# EAGLE board people_counter_v1 (EAGLE 9.6.2)
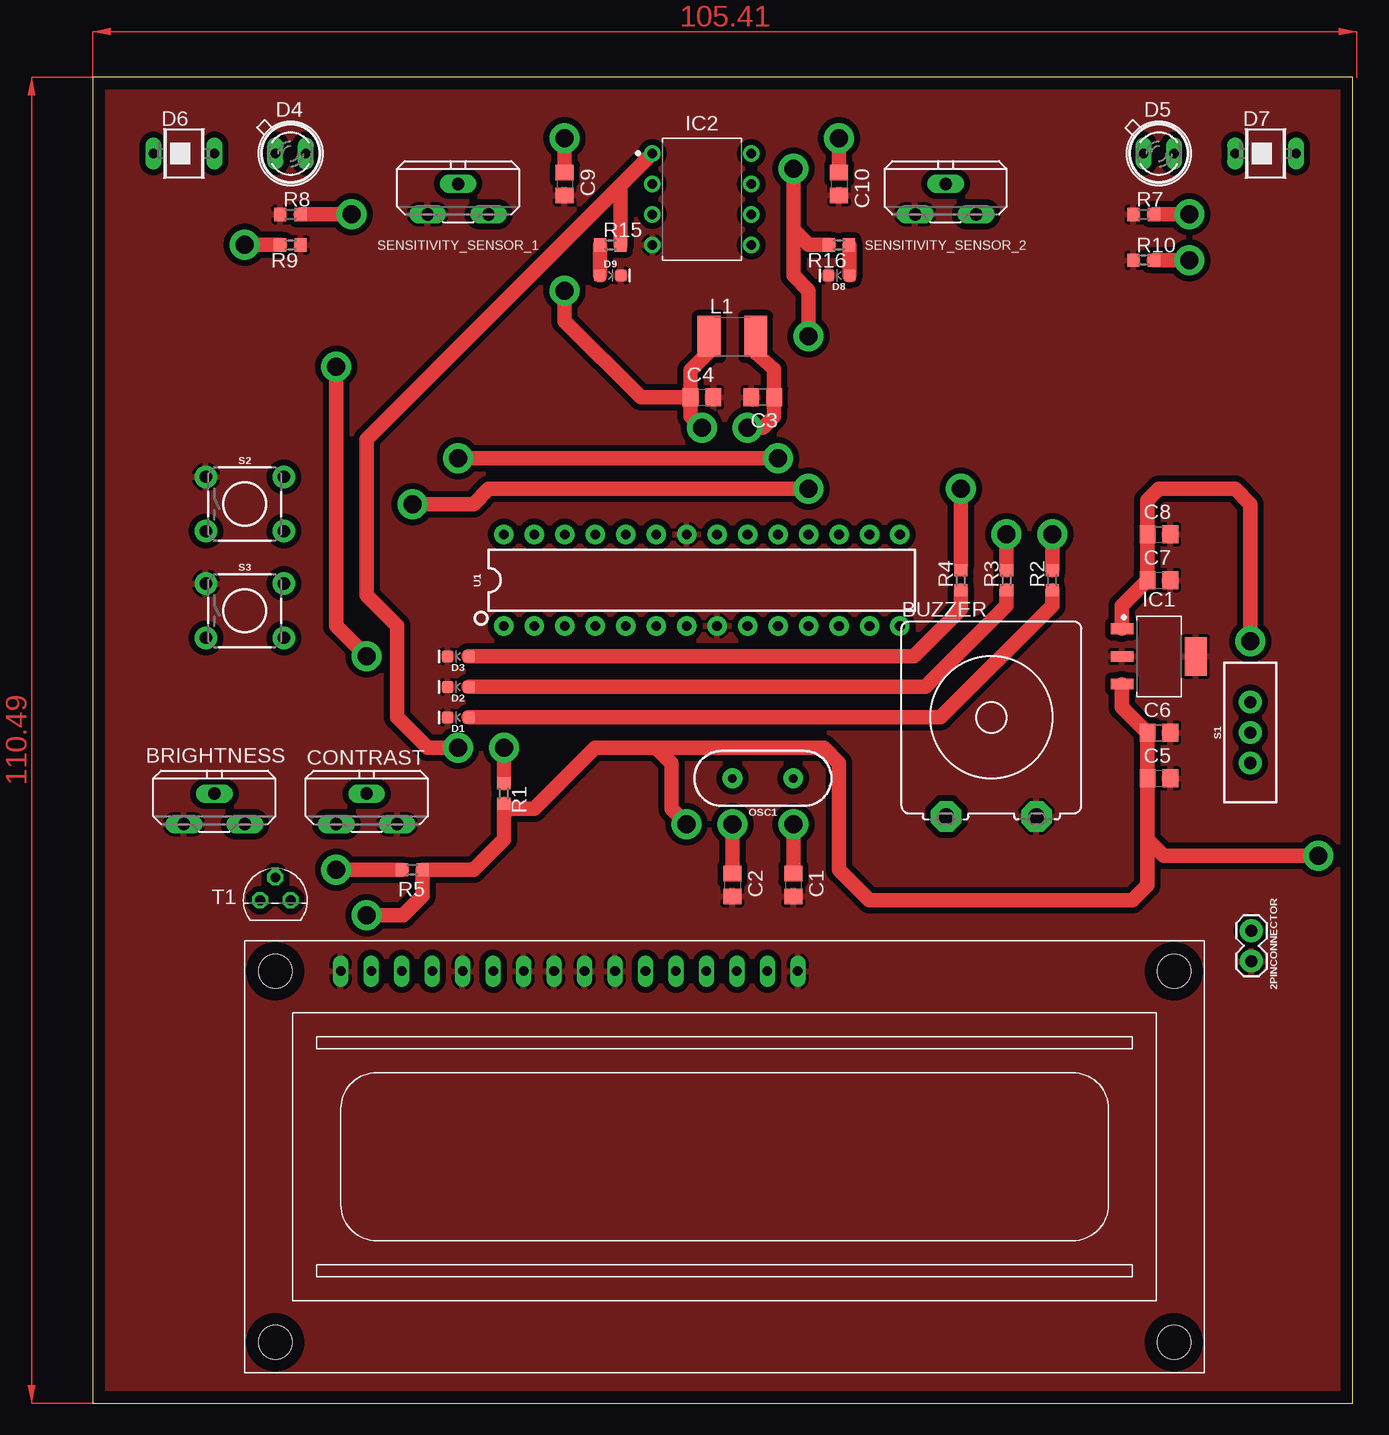
[diagram p0: board, top side]
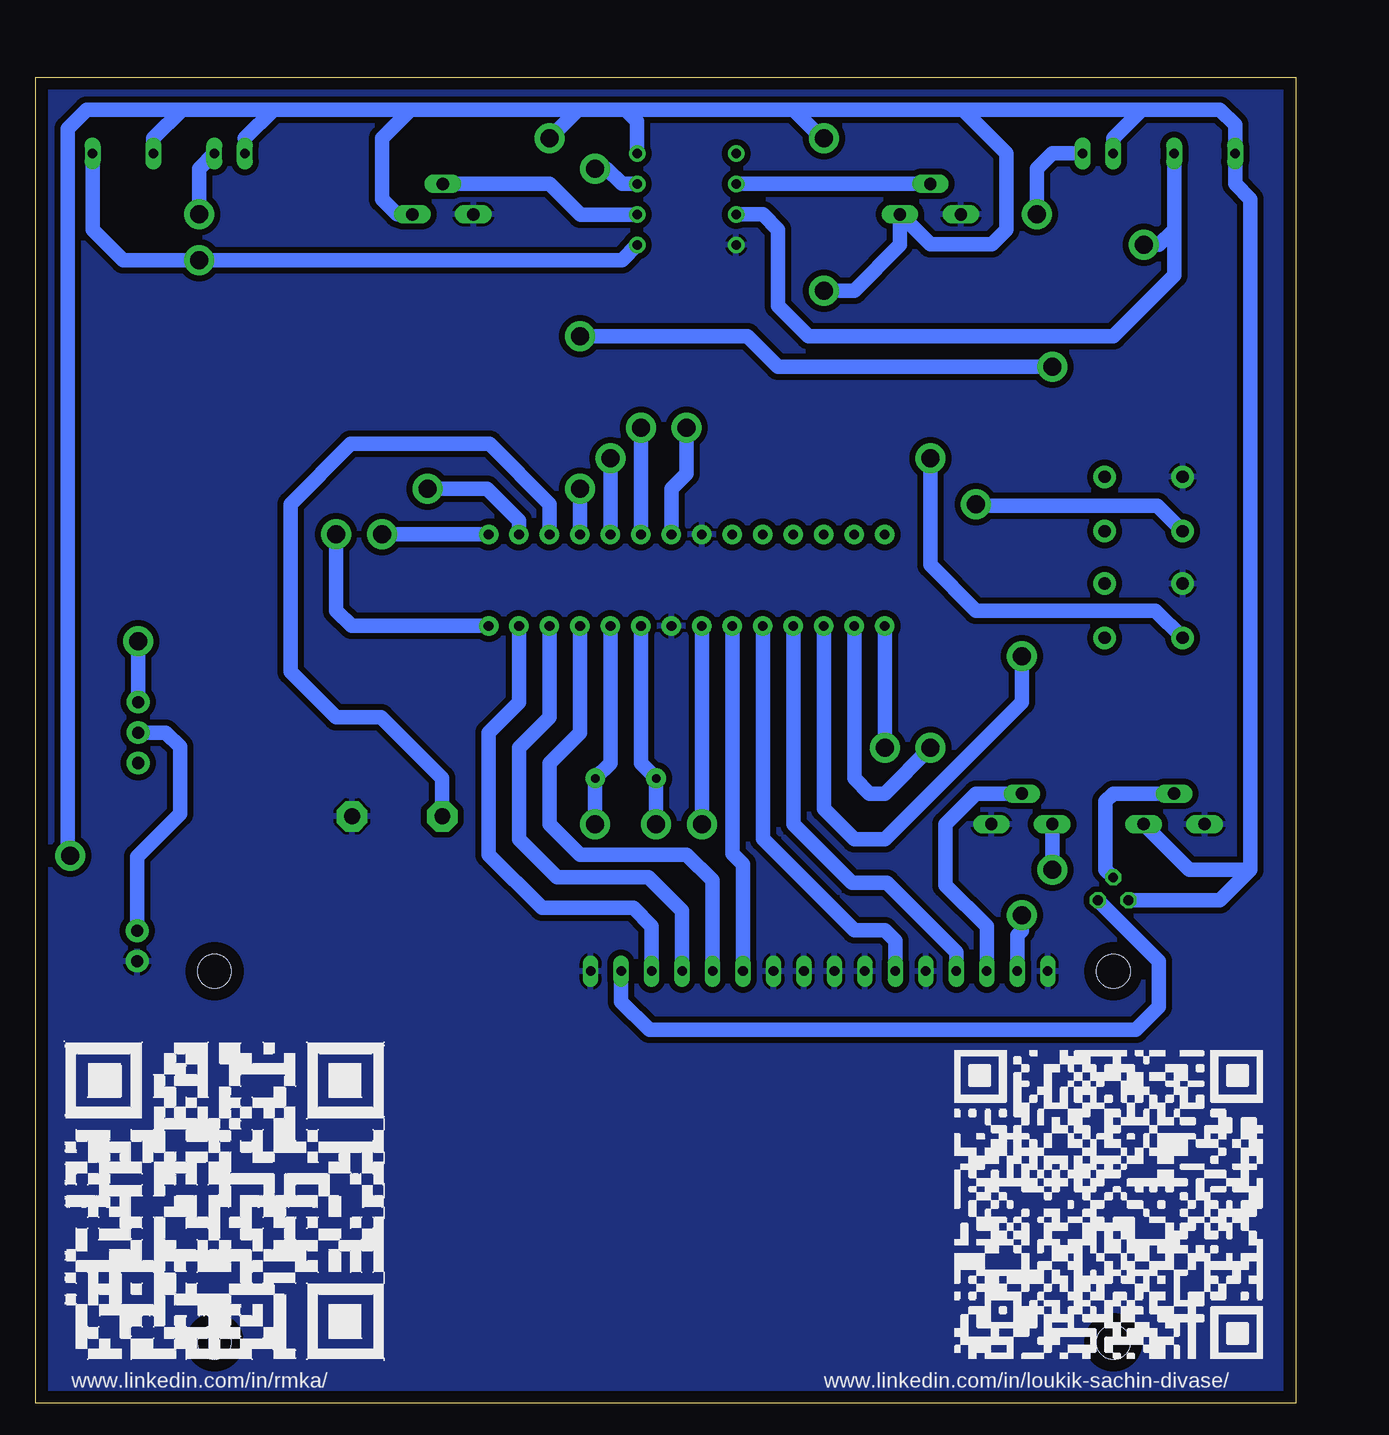
[diagram p1: board, bottom side, seen from below]

Size 105.08 x 110.48 mm. Coordinates in mm from the lower left corner, seen from the top.
Outline: 0,0 105.08,0 105.08,110.48 0,110.48 0,0
Copper layers (1*16): Top 0.035mm / dielectric 1.5mm / Bottom 0.035mm
Design rules "default": minimum track width 6mil, minimum drill 0.35mm, track to track 6mil, track to pad 6mil, pad to pad 6mil, via to via 6mil, smd to smd 6mil, copper to edge 40mil, drill to drill 6mil, minimum pad ring 10mil, minimum via ring 8mil, stop-mask expansion 4mil, vias tented up to drill 0mil, thermal gap 10mil
Net classes: 0 default: clearance 0.5 mm

## Footprints (pad centres in the part's own frame; a part is rotated, then mirrored left to right if it is on the bottom)
1X02 = drill 1.016 pad 1.88: 1 0,0; 2 2.54,0
PT-10S = drill 1.016 long: A -2.54,-1.27; E 2.54,-1.27; S 0,1.27
B/C11L = drill 1.321 pad 2.54 octagon: 1 -3.759,-8.255; 2 3.759,-8.255
C0805 = smd 1.3 x 1.5: 1 -0.95,0; 2 0.95,0
LED-0603 = smd 1 x 1: A -0.877,0; C 0.877,0
SFH482 = drill 0.813 long: A -1.27,0; K 1.27,0
BP104 = drill 0.813 long: A 0,2.54; K 0,-2.54
SOT230P700X170-4 = smd 1.86 x 0.898: 1 -3.075,2.3; 2 -3.075,0; 3 -3.075,-2.3 | smd 1.86 x 3.189: 4 3.075,0
DIP826W53P254L959H508Q8B = drill 0.786 pad 1.386: 1 -4.13,3.81; 2 -4.13,1.27; 3 -4.13,-1.27; 4 -4.13,-3.81; 5 4.13,-3.81; 6 4.13,-1.27; 7 4.13,1.27; 8 4.13,3.81
L1812 = smd 1.9 x 3.4: 1 -1.95,0; 2 1.95,0
HC49US = drill 0.7 pad 1.651: 1 -2.54,0; 2 2.54,0
R0603 = smd 1 x 1.1: 1 -0.85,0; 2 0.85,0
SWITCH_SPDT_PTH_11.6X4.0MM = drill 1.016 pad 1.88: 1 0,2.54; 2 0,0; 3 0,-2.54
TACTILE_SWITCH_PTH_6.0MM = drill 1.016 pad 1.88: 1 -3.251,2.261; 2 3.251,2.261; 3 -3.251,-2.261; 4 3.251,-2.261
TO92 = drill 0.813 octagon: 1 1.27,0; 2 0,1.905; 3 -1.27,0
DIP28 = drill 0.813 pad 1.626: 1 -16.51,-3.81; 2 -13.97,-3.81; 3 -11.43,-3.81; 4 -8.89,-3.81; 5 -6.35,-3.81; 6 -3.81,-3.81; 7 -1.27,-3.81; 8 1.27,-3.81; 9 3.81,-3.81; 10 6.35,-3.81; 11 8.89,-3.81; 12 11.43,-3.81; 13 13.97,-3.81; 14 16.51,-3.81; 15 16.51,3.81; 16 13.97,3.81; 17 11.43,3.81; 18 8.89,3.81; 19 6.35,3.81; 20 3.81,3.81; 21 1.27,3.81; 22 -1.27,3.81; 23 -3.81,3.81; 24 -6.35,3.81; 25 -8.89,3.81; 26 -11.43,3.81; 27 -13.97,3.81; 28 -16.51,3.81
LCD1602 = drill 0.8 long: 1 8,33.46; 2 10.54,33.46; 3 13.08,33.46; 4 15.62,33.46; 5 18.16,33.46; 6 20.7,33.46; 7 23.24,33.46; 8 25.78,33.46; 9 28.32,33.46; 10 30.86,33.46; 11 33.4,33.46; 12 35.94,33.46; 13 38.48,33.46; 14 41.02,33.46; 15 43.56,33.46; 16 46.1,33.46 | hole 2.8: 2.54,2.54; 2.54,33.46; 77.46,33.46; 77.46,2.54

## Placement (x,y rotation side)
2PINCONNECTOR  [1X02]  96.6,39.37 270 top
BRIGHTNESS  [PT-10S]  10.16,49.53 0 top
BUZZER  B/C11L  [B/C11L]  74.93,57.15 0 top
C1  22pF  [C0805]  58.42,43.18 270 top
C2  22pF  [C0805]  53.34,43.18 270 top
C3  100nF  [C0805]  55.88,83.82 180 top
C4  100nF  [C0805]  50.8,83.82 0 top
C5  100nF  [C0805]  88.9,52.07 0 top
C6  220µF  [C0805]  88.9,55.88 0 top
C7  100nF  [C0805]  88.9,68.58 0 top
C8  220µF  [C0805]  88.9,72.39 0 top
C9  0.1µF  [C0805]  39.37,101.6 270 top
C10  0.1µF  [C0805]  62.23,101.6 270 top
CONTRAST  [PT-10S]  22.86,49.53 0 top
D1  Red  [LED-0603]  30.48,57.15 180 top
D2  Yellow  [LED-0603]  30.48,59.69 180 top
D3  Green  [LED-0603]  30.48,62.23 180 top
D4  SFH482  [SFH482]  16.51,104.14 0 top
D5  SFH482  [SFH482]  88.9,104.14 0 top
D6  [BP104]  7.62,104.14 270 top
D7  [BP104]  97.79,104.14 270 top
D8  Green  [LED-0603]  62.23,93.98 180 top
D9  Green  [LED-0603]  43.18,93.98 0 top
IC1  7805  [SOT230P700X170-4]  88.9,62.23 0 top
IC2  LM393_DIP  [DIP826W53P254L959H508Q8B]  50.8,100.33 0 top
L1  10µH  [L1812]  53.34,88.9 0 top
OSC1  16MHz  [HC49US]  55.88,52.07 180 top
R1  10k  [R0603]  34.29,50.8 270 top
R2  220  [R0603]  80.01,68.58 90 top
R3  220  [R0603]  76.2,68.58 90 top
R4  220  [R0603]  72.39,68.58 90 top
R5  10k  [R0603]  26.67,44.45 180 top
R7  220  [R0603]  87.63,99.06 0 top
R8  220  [R0603]  16.51,99.06 0 top
R9  10k  [R0603]  16.51,96.52 180 top
R10  10k  [R0603]  87.63,95.25 0 top
R15  220  [R0603]  43.18,96.52 0 top
R16  220  [R0603]  62.23,96.52 180 top
S1  [SWITCH_SPDT_PTH_11.6X4.0MM]  96.52,55.88 0 top
S2  MOMENTARY-SWITCH-SPST-PTH-6.0MM  [TACTILE_SWITCH_PTH_6.0MM]  12.7,74.93 0 top
S3  MOMENTARY-SWITCH-SPST-PTH-6.0MM  [TACTILE_SWITCH_PTH_6.0MM]  12.7,66.04 0 top
SENSITIVITY_SENSOR_1  [PT-10S]  30.48,100.33 0 top
SENSITIVITY_SENSOR_2  [PT-10S]  71.12,100.33 0 top
T1  BC547  [TO92]  15.24,41.91 0 top
U1  328P  [DIP28]  50.8,68.58 0 top
X1  [LCD1602]  12.7,2.54 0 top

## Library data of the parts
2PINCONNECTOR = SparkFun-Connectors
BRIGHTNESS CONTRAST SENSITIVITY_SENSOR_1 SENSITIVITY_SENSOR_2 = pot
BUZZER = buzzer; OC_FARNELL: unknown; OC_NEWARK: unknown
C1-C10 = rcl; SPICEPREFIX: C
D1 = SparkFun-LED; PROD_ID: DIO-16511
D2 = SparkFun-LED; PROD_ID: DIO-16514
D3 D8 D9 = SparkFun-LED; PROD_ID: DIO-16512
D4 D5 = led
D6 D7 = opto-trans-siemens; MF: VISHAY/TELEFUNKEN; MPN: BP104; OC_FARNELL: 1779636; OC_NEWARK: 14M4504
IC1 = IC_Power-Management; CATEGORY: IC_Logic; DESCRIPTION: 5V Voltage Regulator; MANUFACTURER: Generic; MPN: Generic; SERIES: LM7805; SUB-CATEGORY: Voltage Regulator; TYPE: 5V
IC2 = Tinkercad
L1 = rcl; SPICEPREFIX: L
OSC1 = SparkFun-Clocks; PROD_ID: XTAL-08181; SF_ID: COM-00536
R1-R5 R7-R10 R15 R16 = rcl; SPICEPREFIX: R
S1 = SparkFun-Switches; PROD_ID: SWCH-08261; SF_SKU: COM-00102
S2 S3 = SparkFun-Switches; PROD_ID: SWCH-08441; SF_SKU: COM-00097
T1 = transistor
U1 = SparkFun-IC-Microcontroller; PROD_ID: IC-09136
X1 = adafruit

## Nets
AVCC: C3.1 L1.2 U1.20
DB4: U1.6 X1.11
DB5: U1.11 X1.12
DB6: U1.12 X1.13
DB7: U1.13 X1.14
E: U1.5 X1.6
N$1: C7.1 C8.1 IC1.1 S1.1
N$2: BRIGHTNESS.S T1.2
N$3: 2PINCONNECTOR.1 S1.2
N$4: D1.A R2.1
N$6: D2.A R3.1
N$8: CONTRAST.A R5.2
N$9: D3.A R4.1
N$10: D6.A IC2.3 R9.2
N$12: D7.A IC2.5 R10.2
N$14: D5.K R7.2
N$16: D4.K R8.2
N$17: IC2.1 R15.2 U1.2
N$18: IC2.7 R16.2 U1.3
N$19: IC2.2 SENSITIVITY_SENSOR_1.S
N$20: IC2.6 SENSITIVITY_SENSOR_2.S
N$23: T1.1 X1.15
N$24: D9.A R15.1
N$25: D8.A R16.1
PB0: R2.2 U1.14
PB1: R3.2 U1.15
PB2: R4.2 U1.16
PB3: BUZZER.1 U1.17
PB4: S2.3 U1.18
PB5: S3.3 U1.19
RESET: R1.1 U1.1
RS: U1.4 X1.4
VCC: BRIGHTNESS.E C4.1 C5.1 C6.1 C9.1 C10.1 D4.A D5.A D6.K D7.K IC1.3 IC2.8 L1.1 R1.2 R5.1 SENSITIVITY_SENSOR_1.E SENSITIVITY_SENSOR_2.E T1.3 U1.7 U1.21 X1.2
VO: CONTRAST.S X1.3
VSS: 2PINCONNECTOR.2 BRIGHTNESS.A BUZZER.2 C1.2 C2.2 C3.2 C4.2 C5.2 C6.2 C7.2 C8.2 C9.2 C10.2 CONTRAST.E D1.C D2.C D3.C D8.C D9.C IC1.2 IC1.4 IC2.4 R7.1 R8.1 R9.1 R10.1 S2.1 S3.1 SENSITIVITY_SENSOR_1.A SENSITIVITY_SENSOR_2.A U1.8 U1.22 X1.1 X1.5 X1.7 X1.8 X1.9 X1.10 X1.16
XTAL1: C2.1 OSC1.2 U1.9
XTAL2: C1.1 OSC1.1 U1.10

## Tracks (layer width: path | path; a pad name or v marks a point on that pad's centre or on a via)
AVCC  (via drill 1.5 pad 2.5)
  Top 1.2: L1.2 55.29,87.5 56.83,86.18 C3.1 56.83,82.23 55.88,81.28 v54.61,81.28
  Bottom 1.2: v54.61,81.28 U1.20
DB4
  Bottom 1.2: U1.6 46.99,45.78 46.1,44.89 X1.11
DB5
  Bottom 1.2: X1.12 48.64,43.56 50.8,45.72 59.69,45.72 62.23,48.26 62.23,53.34 59.69,55.88 U1.11
DB6
  Bottom 1.2: X1.13 51.18,41.02 53.98,43.81 61.59,43.81 64.77,46.99 64.77,54.61 62.23,57.15 U1.12
DB7
  Bottom 1.2: X1.14 53.72,39.75 55.24,41.27 62.87,41.27 67.31,45.72 67.31,55.88 64.77,58.42 U1.13
E
  Bottom 1.2: X1.6 33.4,38.53 34.27,39.4 36.8,39.4 44.45,47.04 U1.5
N$1  (via drill 1.5 pad 2.5)
  Top 1.2: IC1.1 85.83,66.45 C7.1 C8.1 87.95,75.25 88.9,76.2 95.25,76.2 96.52,74.93 v96.52,63.5
  Bottom 1.2: S1.1 v96.52,63.5
N$2
  Bottom 1.2: BRIGHTNESS.S 15.24,50.8 15.88,50.16 15.88,44.45 T1.2
N$3
  Bottom 1.2: S1.2 94.23,55.88 93.04,54.69 93.04,49.12 96.61,45.55 2PINCONNECTOR.1
N$4
  Top 1.2: D1.A 70.7,57.15 80.01,66.46 R2.1
N$6
  Top 1.2: D2.A 69.43,59.69 76.2,66.46 R3.1
N$8  (via drill 1.5 pad 2.5)
  Top 1.2: R5.2 v20.32,44.45
  Bottom 1.2: CONTRAST.A v20.32,44.45
N$9
  Top 1.2: D3.A 68.46,62.23 72.39,66.16 R4.1
N$10  (via drill 1.5 pad 2.5)
  Top 1.2: v12.7,96.52 R9.2
  Bottom 1.2: IC2.3 44.45,99.06 43.18,97.79 43.18,91.44 40.64,88.9 15.24,88.9 10.16,93.98 10.16,97.79 | 10.16,97.79 D6.A | 10.16,97.79 11.43,96.52 v12.7,96.52
N$12  (via drill 1.5 pad 2.5)
  Top 1.2: R10.2 v91.44,95.25
  Bottom 1.2: D7.A 100.33,97.79 97.79,95.25 v91.44,95.25 56.2,95.25 IC2.5
N$14  (via drill 1.5 pad 2.5)
  Top 1.2: R7.2 v91.44,99.06
  Bottom 1.2: v91.44,99.06 91.44,102.87 D5.K
N$16  (via drill 1.5 pad 2.5)
  Top 1.2: v21.59,99.06 R8.2
  Bottom 1.2: v21.59,99.06 21.59,102.87 20.32,104.14 D4.K
N$17  (via drill 1.5 pad 2.5)
  Top 1.2: v30.48,54.61 27.94,54.61 25.4,57.15 25.4,64.77 22.86,67.31 22.86,80.33 44.03,101.5 | 44.03,101.5 IC2.1 | R15.2 44.03,101.5
  Bottom 1.2: U1.2 36.83,52.07 35.56,50.8 34.29,50.8 v30.48,54.61
N$18  (via drill 1.5 pad 2.5)
  Top 1.2: v20.32,86.36 20.32,64.77 v22.86,62.23 | v59.69,88.9 59.69,92.71 58.42,93.98 v58.42,102.87 58.42,97.79 59.69,96.52 R16.2
  Bottom 1.2: v22.86,62.23 22.86,58.42 34.29,46.99 36.83,46.99 39.37,49.53 U1.3 | v59.69,88.9 45.72,88.9 43.18,86.36 v20.32,86.36 | v58.42,102.87 57.47,102.87 56.2,101.6 IC2.7
N$19
  Bottom 1.2: IC2.2 SENSITIVITY_SENSOR_1.S
N$20
  Bottom 0.8: IC2.6 54.96,99.03
  Bottom 1.2: 54.96,99.03 59.66,99.03 62.23,101.6 SENSITIVITY_SENSOR_2.S
N$23
  Bottom 1.2: T1.1 11.43,36.83 11.43,33.02 13.34,31.12 53.91,31.12 56.26,33.46 X1.15
N$24
  Top 0.8: 42.3,96.49 R15.1
  Top 1.2: D9.A 42.3,96.49
N$25
  Top 0.8: R16.1 63.11,96.49
  Top 1.2: 63.11,96.49 D8.A
PB0  (via drill 1.5 pad 2.5)
  Top 1.2: v80.01,72.39 R2.2
  Bottom 1.2: v80.01,72.39 80.01,66.04 78.74,64.77 U1.14
PB1  (via drill 1.5 pad 2.5)
  Top 1.2: R3.2 v76.2,72.39
  Bottom 1.2: v76.2,72.39 U1.15
PB2  (via drill 1.5 pad 2.5)
  Top 0.8: R4.2 72.39,69.85
  Top 1.2: 72.39,69.85 v72.39,76.2
  Bottom 1.2: v72.39,76.2 67.43,76.2 64.77,73.54 U1.16
PB3
  Bottom 1.2: BUZZER.1 71.17,52.07 76.25,57.15 80.01,57.15 83.82,60.96 83.82,74.93 78.81,79.94 67.24,79.94 62.23,74.93 U1.17
PB4  (via drill 1.5 pad 2.5)
  Top 1.2: v26.67,74.93 31.75,74.93 33.02,76.2 v59.69,76.2
  Bottom 1.2: U1.18 v59.69,76.2 | v26.67,74.93 26.53,74.79 11.57,74.79 S2.3
PB5  (via drill 1.5 pad 2.5)
  Top 1.2: v30.48,78.74 v57.15,78.74
  Bottom 1.2: U1.19 v57.15,78.74 | v30.48,78.74 30.48,69.85 26.67,66.04 11.71,66.04 S3.3
RESET  (via drill 1.5 pad 2.5)
  Top 1.2: v34.29,54.61 R1.1
  Bottom 1.2: U1.1 v34.29,54.61
RS
  Bottom 1.2: X1.4 28.32,37.58 34.1,43.37 37.02,43.37 41.91,48.26 U1.4
VCC  (via drill 1.5 pad 2.5)
  Top 1.2: L1.1 51.39,87.63 49.85,86.09 C4.1 | 87.95,46.99 C5.1 C6.1 85.83,58.01 IC1.3 | 46.99,54.61 60.96,54.61 62.23,53.34 62.23,44.45 64.77,41.91 86.68,41.91 87.95,43.18 87.95,46.99 | 46.99,54.61 41.91,54.61 36.83,49.53 34.71,49.53 R1.2 34.29,46.99 31.75,44.45 R5.1 27.52,42.27 25.89,40.64 v22.86,40.64 | C4.1 45.72,83.82 39.37,90.17 v39.37,92.71 | v39.37,105.41 C9.1 | v62.23,105.41 C10.1 | v49.53,48.26 48.26,49.53 48.26,53.34 46.99,54.61 | v102.19,45.64 89.31,45.64 87.95,46.99 | C4.1 49.85,82.23 v50.8,81.28
  Bottom 0.8: D5.A 87.63,105.41
  Bottom 1.2: 12.86,107.79 6.35,107.79 5.08,106.52 D6.K 5.08,101.6 3.81,100.33 3.81,44.45 | 12.86,107.79 27.78,107.79 | 27.78,107.79 41.91,107.79 | 55.88,107.79 59.85,107.79 | IC2.8 54.93,106.84 55.88,107.79 | v39.37,105.41 39.53,105.41 41.91,107.79 | U1.7 v49.53,48.26 | 59.85,107.79 73.82,107.79 | 73.82,107.79 76.2,105.41 76.2,100.33 74.93,99.06 SENSITIVITY_SENSOR_2.E | 41.91,107.79 55.88,107.79 | v62.23,105.41 59.85,107.79 | 27.78,107.79 24.13,104.14 24.13,97.79 25.36,96.56 30.48,96.56 32.98,99.06 SENSITIVITY_SENSOR_1.E 33.02,96.52 36.83,92.71 v39.37,92.71 | v102.19,45.64 102.39,45.64 102.39,106.21 100.81,107.79 92.87,107.79 | v102.19,45.64 | 73.82,107.79 85.25,107.79 | 85.25,107.79 92.87,107.79 | D7.K 95.25,105.41 92.87,107.79 | 87.63,105.41 85.25,107.79 | D4.A 15.24,105.41 12.86,107.79 | v50.8,81.28 50.8,77.47 52.07,76.2 U1.21 | BRIGHTNESS.E 8.89,44.45 3.81,44.45 | T1.3 6.35,41.91 3.81,44.45 | v22.86,40.64 22.86,39.37 23.24,38.99 X1.2
VO
  Bottom 1.2: X1.3 25.78,39.75 29.21,43.18 29.21,48.26 26.67,50.8 CONTRAST.S
VSS
  pour Top (isolate 0.3): 0,110.49 105.41,110.49 105.41,0 0,0
  pour Bottom (isolate 0.3): 0,110.49 105.41,110.49 105.41,0 0,0
XTAL1  (via drill 1.5 pad 2.5)
  Top 1.2: v53.34,48.26 C2.1
  Bottom 1.2: U1.9 54.61,53.34 OSC1.2 v53.34,48.26
XTAL2  (via drill 1.5 pad 2.5)
  Top 1.2: v58.42,48.26 C1.1
  Bottom 1.2: U1.10 57.15,53.34 OSC1.1 v58.42,48.26
(copper drawn outside any net)
  shapes: Top area x2

## Text on the board
bNames: www.linkedin.com/in/loukik-sachin-divase/ | www.linkedin.com/in/rmka/